# Altium PCB project_9.PcbDoc
Units mil, origin at the board's own origin, x right, y up, seen from the top; angles counter-clockwise.
Board outline 2620 x 2195 mil, 2 copper layers (Top Layer, Bottom Layer); 22 components, 46 nets, 108 pads, 6 vias.
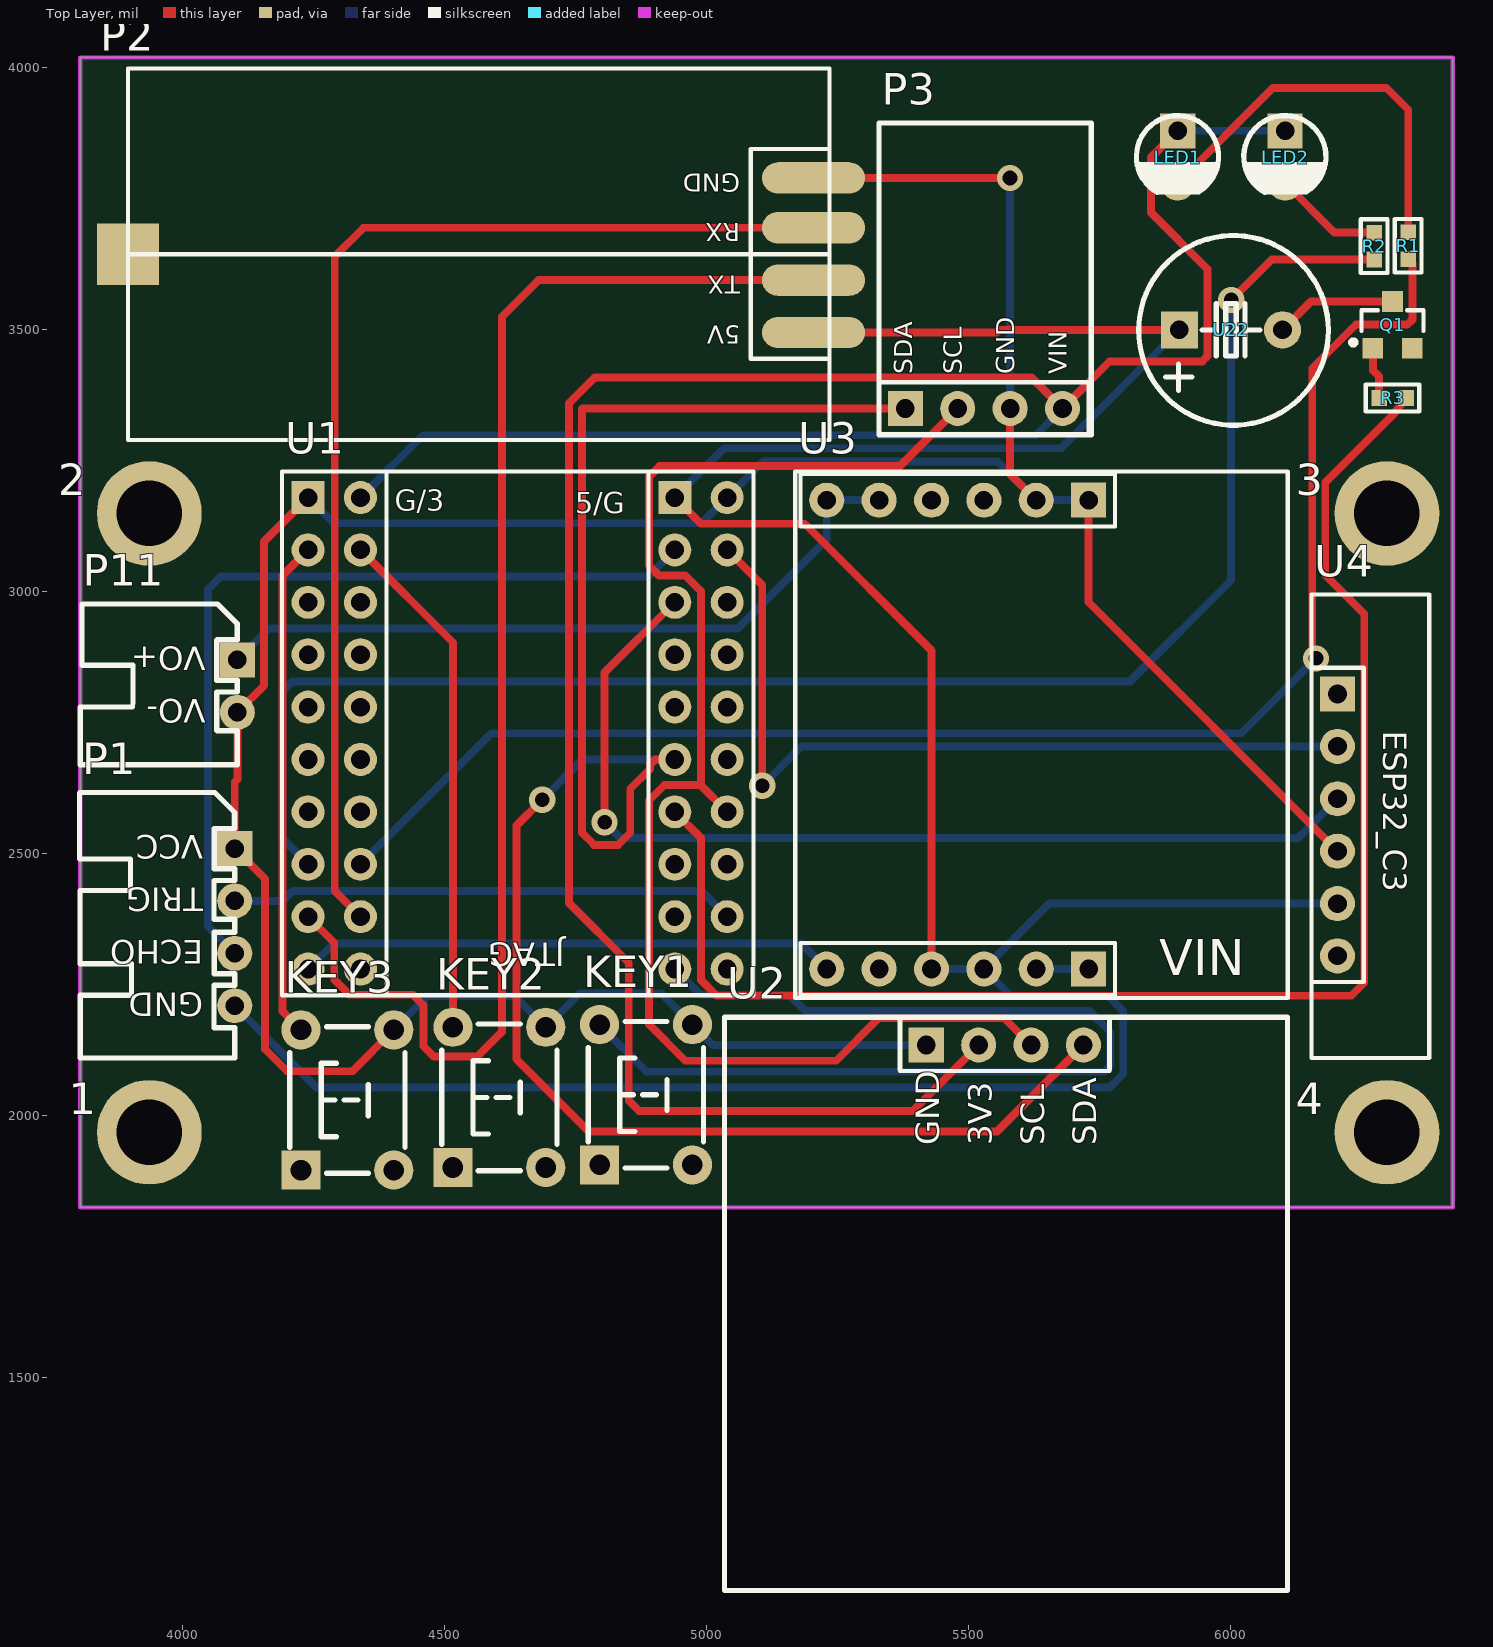
[diagram p0: Top Layer view]
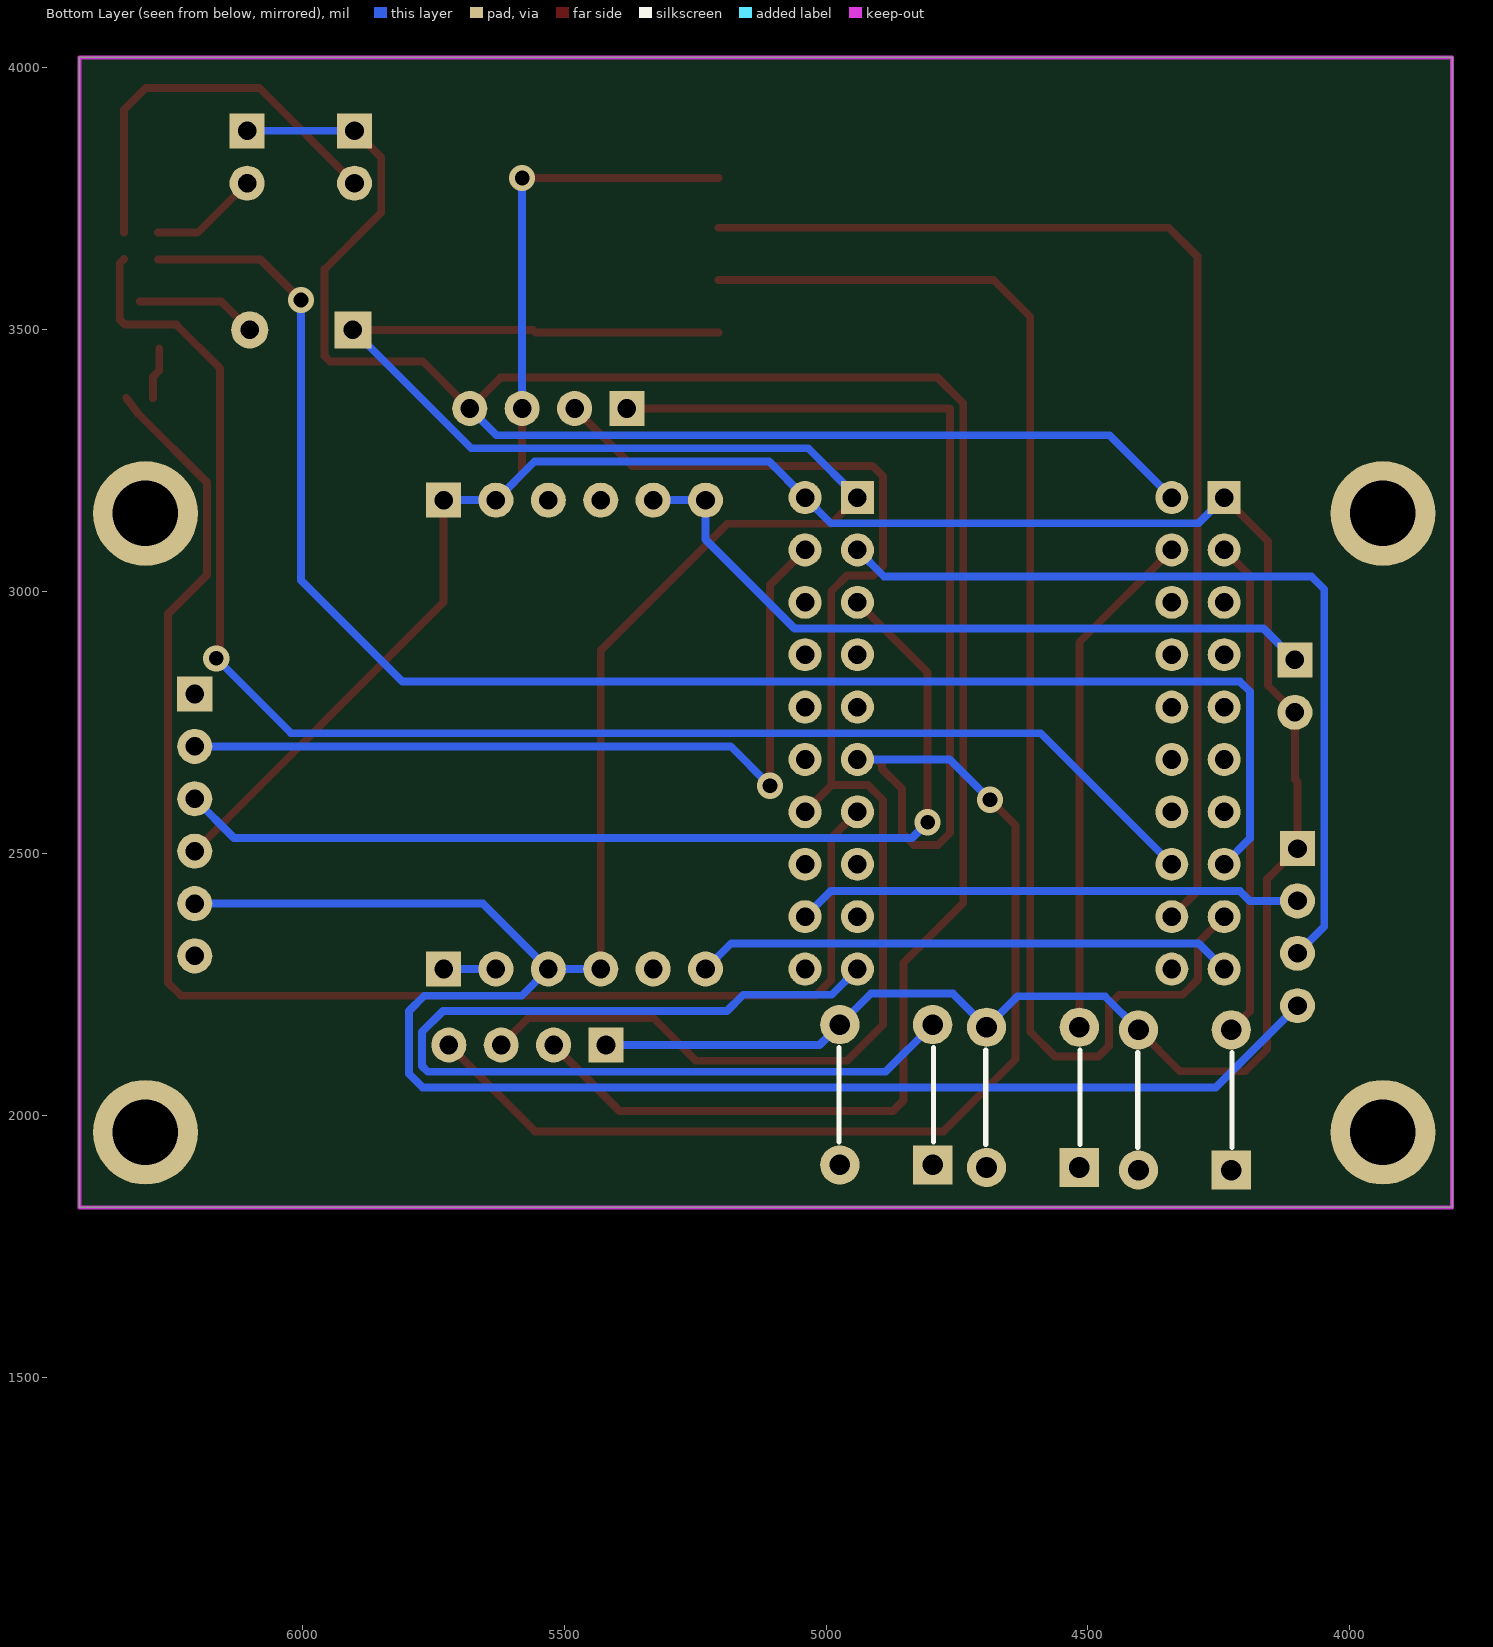
[diagram p1: Bottom Layer view, seen from below]

## Layer stack, top to bottom
Top Solder: solder mask 0.4, Solder Resist, Dk 3.5
Top Layer: signal copper 1.4
Dielectric 1: dielectric 12.6, FR-4, Dk 4.8
Bottom Layer: signal copper 1.4
Bottom Solder: solder mask 0.4, Solder Resist, Dk 3.5

## Board outline
3805,1825 3805,4020 6425,4020 6425,1825

## Design rules (kind name [scope] priority, off if disabled: settings)
Clearance [All] p1: gap=10 ignorepadtopadclearanceinfootprint=FALSE
PolygonConnect [All] p1: connectstyle=Relief reliefconductorwidth=10 reliefentries=4 polygonreliefangle="90 Angle" airgapwidth=10
RoutingVias [All] p1: holewidth=28 width=50 viastyle="Through Hole" minholewidth=28 minwidth=50 maxholewidth=28 maxwidth=50
SolderMaskExpansion [All] p1: expansion=4 istentingtop=FALSE
SupplyNets "Schematic Supply Nets_5" [InNet('VSS')] p1: voltage=0.000
SupplyNets "Schematic Supply Nets_4" [InNet('VCC')] p2: voltage=0.000
SupplyNets "Schematic Supply Nets_3" [InNet('5V_POW')] p3: voltage=0.000
SupplyNets "Schematic Supply Nets_2" [InNet('3V3')] p4: voltage=0.000
SupplyNets "Schematic Supply Nets_1" [InNet('5V')] p5: voltage=0.000
SupplyNets "Schematic Supply Nets" [InNet('GND')] p6: voltage=0.000
Width [All] p1: maxlimit=3937.01 minlimit=10 preferedwidth=15 minimp=50.000000 maximp=50.000000 favimp=50.000000
30 further rules are at their usual default settings.

## Components (designator, comment, footprint, x,y, rotation, side; value= is the part's Value field where it differs from the comment)
1 "M3" "M3 125X200" 3937.01,1968.5 r90 top
2 "M3" "M3 125X200" 3937.01,3149.61 r90 top
3 "M3" "M3 125X200" 6299.21,3149.61 r90 top
4 "M3" "M3 125X200" 6299.21,1968.5 r90 top
KEY1 "mod_buttom" MOD_BUTTOM 4885,2030 r90 top
KEY2 "mod_buttom" MOD_BUTTOM 4605,2025 r90 top
KEY3 "mod_buttom" MOD_BUTTOM 4315,2020 r90 top
LED1 "红色" "LED 3MM-B" 5900,3830 r270 top
LED2 "红色" "LED 3MM-B" 6105,3830 r270 top
P1 "port_4p" MOD_ECHO(XH2.54) 3950,2375 r90 top
P2 "port_4p" MOD_RS485 4660,3655 r90 top
P3 "port_4p" MOD_TEMP 5540,3575 r0 top
P11 "port_mot_2p" XH2.54_2P 3980,2815 r90 top
Q1 "SS8050" SOT23-3L 6310,3510 r0 top
R1 "1K" "R 0603_L" 6340,3660.59 r90 top
R2 "1K" "R 0603_L" 6275,3660 r90 top
R3 "1K" "R 0603_L" 6310,3370 r180 top
U1 "f1_hw_1_gw" F1_HW_1_GW 4630,2715 r90 top
U2 "mod_oled" MOD_OLED 5574.91,2133.15 r0 top
U3 "pow_hw_3" POW_HW_3 5505,2840 r0 top
U4 "c3_hw_1" C3_HW_1 6205,2555 r270 top
U22 "mod_buzzer" MOD_BUZZER 6006.57,3495 r180 top

## Footprints (in the part's own frame and the unit in brackets; to place one, negate y for a bottom-side part, rotate by r counter-clockwise, add the part's x,y. Pads: shape width x height; smd on the part's side, far side on the other; paste and mask are expansions set on the pad)
C3_HW_1 [mm]
  rect 1.7x1.7 hole 0.9: 1(-6.35,0)
  round 1.7 hole 0.9: 2(-3.81,0) 3(-1.27,0) 4(1.27,0) 5(3.81,0) 6(6.35,0)
  silkscreen extent -11.18,-1.27 11.3,4.45, body extent -11.18,-1.27 11.3,4.45, height 8.5
F1_HW_1_GW [mm]
  rect 1.6x1.6 hole 0.9: 1(11.811,9.906) 21(11.811,-7.874)
  round 1.6 hole 0.9: 2(11.811,7.366) 3(9.271,9.906) 4(9.271,7.366) 5(6.731,9.906) 6(6.731,7.366) 7(4.191,9.906) 8(4.191,7.366) 9(1.651,9.906) 10(1.651,7.366) 11(-0.889,9.906) 12(-0.889,7.366) 13(-3.429,9.906) 14(-3.429,7.366) 15(-5.969,9.906) 16(-5.969,7.366) 17(-8.509,9.906) 18(-8.509,7.366) 19(-11.049,9.906) 20(-11.049,7.366) 22(11.811,-10.414) 23(9.271,-7.874) 24(9.271,-10.414) 25(6.731,-7.874) 26(6.731,-10.414) 27(4.191,-7.874) 28(4.191,-10.414) 29(1.651,-7.874) 30(1.651,-10.414) 31(-0.889,-7.874) 32(-0.889,-10.414) 33(-3.429,-7.874) 34(-3.429,-10.414) 35(-5.969,-7.874) 36(-5.969,-10.414) 37(-8.509,-7.874) 38(-8.509,-10.414) 39(-11.049,-7.874) 40(-11.049,-10.414)
  silkscreen extent -12.32,-11.68 13.08,11.18, body extent -12.38,-11.68 13.08,11.18, height 8.5
"LED 3MM-B" [mm] "蓝色3mm直插LED"
  rect 1.7x1.7 hole 0.9: 1(-1.27,0)
  round 1.7 hole 0.9: 2(1.27,0)
  silkscreen extent -2.01,-2 1.72,1.98, body extent -1.95,-1.95 1.64,1.95, height 5.55
"M3 125X200" [mil] "M3螺丝孔，孔125Mil，焊盘200Mil"
  round 200 hole 125: 1(0,0)
MOD_BUTTOM [mm]
  rect 1.9x1.9 hole 1: 1(-3.146,2.25)
  round 1.9 hole 1: 2(-3.146,-2.25) 3(3.654,-2.25) 4(3.654,2.25)
  silkscreen extent -3.3,-2.79 3.81,2.79, body extent -3.85,-3 4.36,3, height 4.25
MOD_BUZZER [mm] "有源蜂鸣器"
  rect 1.8x1.8 hole 0.9: 1(2.627,-0.127)
  round 1.8 hole 0.9: 2(-2.373,-0.127)
  silkscreen extent -4.6,-4.7 4.6,4.49, body extent -4.37,-4.63 4.63,4.37, height 5.45
MOD_ECHO(XH2.54) [mm] "超声波模块（GND ECHO TRIG 5V）"
  rect 1.7x1.7 hole 0.9: 1(3.429,-3.81)
  round 1.7 hole 0.9: 2(0.889,-3.81) 3(-1.651,-3.81) 4(-4.191,-3.81)
  silkscreen extent -6.73,-3.81 6.15,3.72, body extent -6.65,-4.1 5.97,3.6, height 5.73
MOD_OLED [mm] "外购屏幕模块接口"
  rect 1.7x1.7 hole 0.9: 1(-3.935,0.047)
  round 1.7 hole 0.9: 2(-1.395,0.047) 3(1.145,0.047) 4(3.685,0.047)
  silkscreen extent -13.72,-26.4 13.58,1.4, body extent -13.72,-26.42 13.59,1.4, height 8.5
MOD_RS485 [mil] "RS485转TTL （5V TX RX G）"
  rect 118.11x118.11 smd: 0(-10.67,763.58)
  oval 60x196.85 smd: 1(-160,-545) 2(-60,-545) 3(40,-545) 4(135,-545)
  silkscreen extent -365,-575 344,764, body extent -365,-575 345,765, height 10
MOD_TEMP [mm] "温度传感器（）"
  rect 1.7x1.7 hole 0.9: 1(-4.064,-5.715)
  round 1.7 hole 0.9: 2(-1.524,-5.715) 3(1.016,-5.715) 4(3.556,-5.715)
  silkscreen extent -5.33,-6.98 4.95,8.13, body extent -5.33,-6.98 4.83,-4.44, height 8.5
POW_HW_3 [mm]
  round 1.7 hole 0.9: 0(3.175,8.509) 1(-1.905,8.509) 1(0.635,8.509) 2(-6.985,8.509) 2(-4.445,8.509) 3(-6.985,-14.224) 4(3.175,-14.224) 5(-1.905,-14.224) 5(0.635,-14.224) -1(-4.445,-14.224)
  rect 1.7x1.7 hole 0.9: 0(5.715,8.509) 4(5.715,-14.224)
  silkscreen extent -8.51,-15.62 15.37,9.91, body extent -8.51,-15.62 15.37,9.91, height 8.5
"R 0603_L" [mil] "1/10W贴片电阻"
  rect 30x30 smd: 1(-25.59,0) 2(25.59,0)
  silkscreen extent -51,-26 51,26, body extent -31,-16 32,16, height 16
SOT23-3L [mm] "3x1.3x1mm(长宽高)"
  rect 1x1 smd: 1(-0.95,-1.143) 2(0.95,-1.143) 3(0,1.125)
  silkscreen extent -2.03,-0.99 1.5,0.7, body extent -1.5,-1.2 1.5,1.2, height 1.05
XH2.54_2P [mm]
  rect 1.7x1.7 hole 0.9: 1(1.397,-3.175)
  round 1.7 hole 0.9: 2(-1.143,-3.175)
  silkscreen extent -3.68,-3.18 4.11,4.44, body extent -3.64,-3.52 3.9,4.17, height 5.73

## Part data
1 2 3 4: library part prot_m3, "m3铜柱孔", BOM名称=铜柱孔, 学习资源=www.ooocke.com, 版权归属=源创客
KEY1 KEY2 KEY3: "6*6*4.3按键"
LED1 LED2: library part mod_LED, "插件LED", BOM名称=插件LED, 学习资源=www.ooocke.com, 版权归属=源创客
P1 P2 P3: "4P模块接口"
P11: "开环直流电机接口 / XH2.54弯排针2p"
Q1: library part 8050-SMD, "高频放大-NPN型", BOM名称=高频放大-NPN型, 学习资源=www.ooocke.com, 属性="40V 1.5A 1W 100MHZ", 版权归属=源创客
R1 R2 R3: library part R, "贴片电阻", BOM名称=贴片电阻, 学习资源=www.ooocke.com, 版权归属=源创客
U2: "oled模块 / 4p排母"
U4: "ESP32C3蓝牙模块 / 6p排母"
U22: "有源蜂鸣器"

## Via types
v1: diameter 50, hole 28, Top Layer to Bottom Layer, 6 vias

## Nets (pads, with @x,y where several pads share a name; then routed paths per layer and width w, separated by ;. In a path a pad name is that pad's centre, name@x,y a point inside that pad or via, vN(x,y) a via of type N, cw(c..) or ccw(c..) an arc to the next point about the centre after c; other vN are vias at no path point)
3V3: LED1.1 LED2.1 P3.4 U1.2 U2.2 | length 5523.1
  Top Layer w15: U2.2 5394,2009 4872,2009 4852,2029 4852,2292 4738,2406 4738,3360 4787,3409 5621,3409 P3.4 5770,3440 5947,3440 5957,3450 5957,3616 5849,3724 5849,3829 LED1.1
  Bottom Layer w15: U1.2 4459,3299 5629,3299 P3.4 ; LED1.1 LED2.1
5V: P1.4 P2.1 U1.21 U3.5 U4.5 U22.1 | length 6032.2
  Top Layer w15: U1.21 4990,3130 5188,3130 5430,2888 U3.5@5430,2280 ; P2.1 5554,3495 5559,3500 U22.1
  Bottom Layer w15: P1.4 4256,2054 5770,2054 5796,2080 5796,2200 5767,2229 5581,2229 U3.5@5530,2280 ; U1.21 5034,3274 5677.15,3274 U22.1 ; U3.5@5430,2280 U3.5@5530,2280 ; U4.5 5655,2405 U3.5@5530,2280
5V_POW: U3.4 | length 100
  Bottom Layer w15: U3.4@5630,2280 U3.4@5730,2280
BOOT0: U1.35
GND: KEY1.3 KEY2.3 KEY3.3 P1.1 P2.4 P3.3 P11.2 U1.1 U1.22 U2.1 U3.0 U4.4 | length 6032.6
  Top Layer w15: U1.1 4156,3096 4156,2821 P11.2 4105,2642 4100,2637 P1.1 4158,2452 4158,2127 4200,2085 4324.72,2085 KEY3.3 ; P2.4 v1(5580,3790) ; P3.3 5580,3225 U3.0@5630,3175 ; U3.0@5730,3175 5730,2980 U4.4
  Bottom Layer w15: U1.1 4289,3131 4991,3131 U1.22 5109,3249 5556,3249 5630,3175 U3.0@5730,3175 ; KEY3.3 4467.72,2228 4634.44,2228 KEY2.3 4757.72,2233 4914.44,2233 KEY1.3 5012.44,2135 U2.1 ; P3.3 v1(5580,3790)
NetLED1_2: LED1.2 R1.2 | length 766.6
  Top Layer w15: LED1.2 6082,3962 6298,3962 6340,3920 R1.2
NetLED2_2: LED2.2 R2.2 | length 209.1
  Top Layer w15: LED2.2 6199.41,3685.59 R2.2
NetQ1_1: Q1.1 R3.2 | length 99.9
  Top Layer w15: Q1.1 6272.6,3422.81 6284.41,3411 R3.2
NetQ1_3: Q1.3 U22.2 | length 232.5
  Top Layer w15: U22.2 6154.29,3554.29 Q1.3
NRST: U1.12
PA0: U1.20
PA1: U1.19 U3.3 | length 1030.6
  Bottom Layer w15: U1.19 4289,2329 5181,2329 U3.3
PA2: P2.3 U1.18 | length 2217.1
  Top Layer w15: U1.18 4291,2429 4291,3640 4346,3695 P2.3
PA3: P2.2 U1.17 | length 2575.8
  Top Layer w15: U1.17 4290,2330 4290,2260 4319,2231 4440,2231 4460,2211 4460,2133 4480,2113 4563,2113 4610,2160 4610,3525 4680,3595 P2.2
PA4: R1.1 U1.16 | length 2891.8
  Top Layer w15: v1(6164,2873) 6156.71,2880.29 6156.71,3426.71 6240,3510 6338,3510 6348,3520 6348,3627 R1.1
  Bottom Layer w15: U1.16 4590,2730 6021,2730 v1(6164,2873)
PA5: R2.1 U1.15 | length 3089.2
  Top Layer w15: v1(6002,3557) 6079.41,3634.41 R2.1
  Bottom Layer w15: U1.15 4191,2529 4191,2810 4210,2829 5809,2829 6002,3022 v1(6002,3557)
PA6: U1.14
PA7: U1.13
PA8: P1.3 U1.23 | length 1638.2
  Bottom Layer w15: P1.3 4049,2361 4049,3005 4073,3029 4889,3029 U1.23
PA9: U1.24 U4.2 | length 1606.8
  Top Layer w15: U1.24 5107,3013 v1(5107,2630)
  Bottom Layer w15: v1(5107,2630) 5182,2705 U4.2
PA10: U1.25 U4.3 | length 1918
  Top Layer w15: v1(4806,2560) 4806,2846 U1.25
  Bottom Layer w15: v1(4806,2560) 4836,2530 6130,2530 U4.3
PA11: U1.26
PA12: U1.27
PA13: U1.28
PA14: U1.29
PA15: U1.30
PB0: U1.11
PB1: U1.9
PB2: U1.10
PB3: U1.32
PB4: P3.1 U1.31 U2.4 | length 3742.1
  Top Layer w15: v1(4687,2603) 4638,2554 4638,2108 4776,1970 5555,1970 U2.4 ; U1.31 4903,2680 4893,2670 4893,2662 4855,2624 4855,2540 4832,2517 4786,2517 4763,2540 4763,3349 4764,3350 P3.1
  Bottom Layer w15: v1(4687,2603) 4764,2680 U1.31
PB5: P3.2 U1.34 U2.3 | length 2796.6
  Top Layer w15: P3.2 5370,3240 4911,3240 4891,3220 4891,3050 4910,3031 4960,3031 4990,3001 4990,2631 ; U2.3 5569,2186 5329,2186 5248,2105 4960,2105 4891,2174 4891,2602 4920,2631 4990,2631 ; 4990,2631 4990,2630 U1.34 4990,2631
PB6: R3.1 U1.33 | length 2839.2
  Top Layer w15: U1.33 4990,2530 4990,2259 5020,2229 6231,2229 6256,2254 6256,2957.71 6181.71,3032 6181.71,3208.71 6313,3340 R3.1
PB7: U1.36
PB8: P1.2 U1.38 | length 968.2
  Bottom Layer w15: P1.2 4191,2410 4210,2429 4991,2429 U1.38
PB9: U1.37
PB10: U1.7
PB11: U1.8
PB12: U1.5
PB13: U1.6
PB14: KEY3.4 U1.3 | length 951.1
  Top Layer w15: KEY3.4 4191,2199.28 4191,3031 U1.3
PB15: KEY2.4 U1.4 | length 984.2
  Top Layer w15: U1.4 4516.42,2903.58 KEY2.4
PC13: KEY1.4 U1.39 | length 1962.1
  Bottom Layer w15: KEY1.4 4886.28,2084 5760,2084 5771,2095 5771,2160 5731,2200 5189,2200 5158,2231 4989,2231 U1.39
VBAT: U1.40
VCC: P11.1 U3.2 | length 1395.3
  Bottom Layer w15: P11.1 4165,2930 5060,2930 5230,3100 5230,3175 U3.2@5330,3175
VSS: Q1.2
pads on no net: 1.1 2.1 3.1 4.1 KEY1.1 KEY1.2 KEY2.1 KEY2.2 KEY3.1 KEY3.2 P2.0 U3.1 U3.-1 U4.1 U4.6

## Keep-outs
Keep-Out Layer:
  lines w7.87: 3805,1825 6425,1825 6425,4020 3805,4020 3805,3450 3805,1825

## Text inside footprints (layer, text, board x,y; h text height)
P1: Top Overlay "VCC" at 4040,2535 h45 r180; Top Overlay "TRIG" at 4040,2435 h45 r180; Top Overlay "ECHO" at 4040,2335 h45 r180; Top Overlay "GND" at 4040,2235 h45 r180
P2: Top Overlay "GND" at 5065,3809.38 h60 r180; Top Overlay "RX" at 5065,3715 h60 r180; Top Overlay "TX" at 5065,3615 h60 r180; Top Overlay "5V" at 5065,3519.38 h60 r180
P3: Top Overlay "SDA" at 5404.38,3415 h60 r90; Top Overlay "SCL" at 5499.38,3415 h60 r90; Top Overlay "GND" at 5599.38,3415 h60 r90; Top Overlay "VIN" at 5700,3415.04 h60 r90
P11: Top Overlay "VO-" at 4045,2795 h45 r180; Top Overlay "VO+" at 4045,2895 h45 r180
U1: Top Overlay "JTAG" at 4730,2330 h45 r180; Top Overlay "G/3" at 4405,3155 h39.37; Top Overlay "5/G" at 4750,3150 h39.37
U2: Top Overlay "3V3" at 5544.91,1943.15 h45 r90; Top Overlay "SCL" at 5644.91,1943.15 h45 r90; Top Overlay "SDA" at 5744.91,1943.15 h45 r90; Top Overlay "GND" at 5444.91,1943.15 h45 r90
U3: Top Overlay "VIN" at 5865.08,2245 h118.11
U4: Top Overlay "ESP32_C3" at 6292.5,2735 h45 r270